# EAGLE board hd44780_backpack_16x1 (EAGLE 5.11)
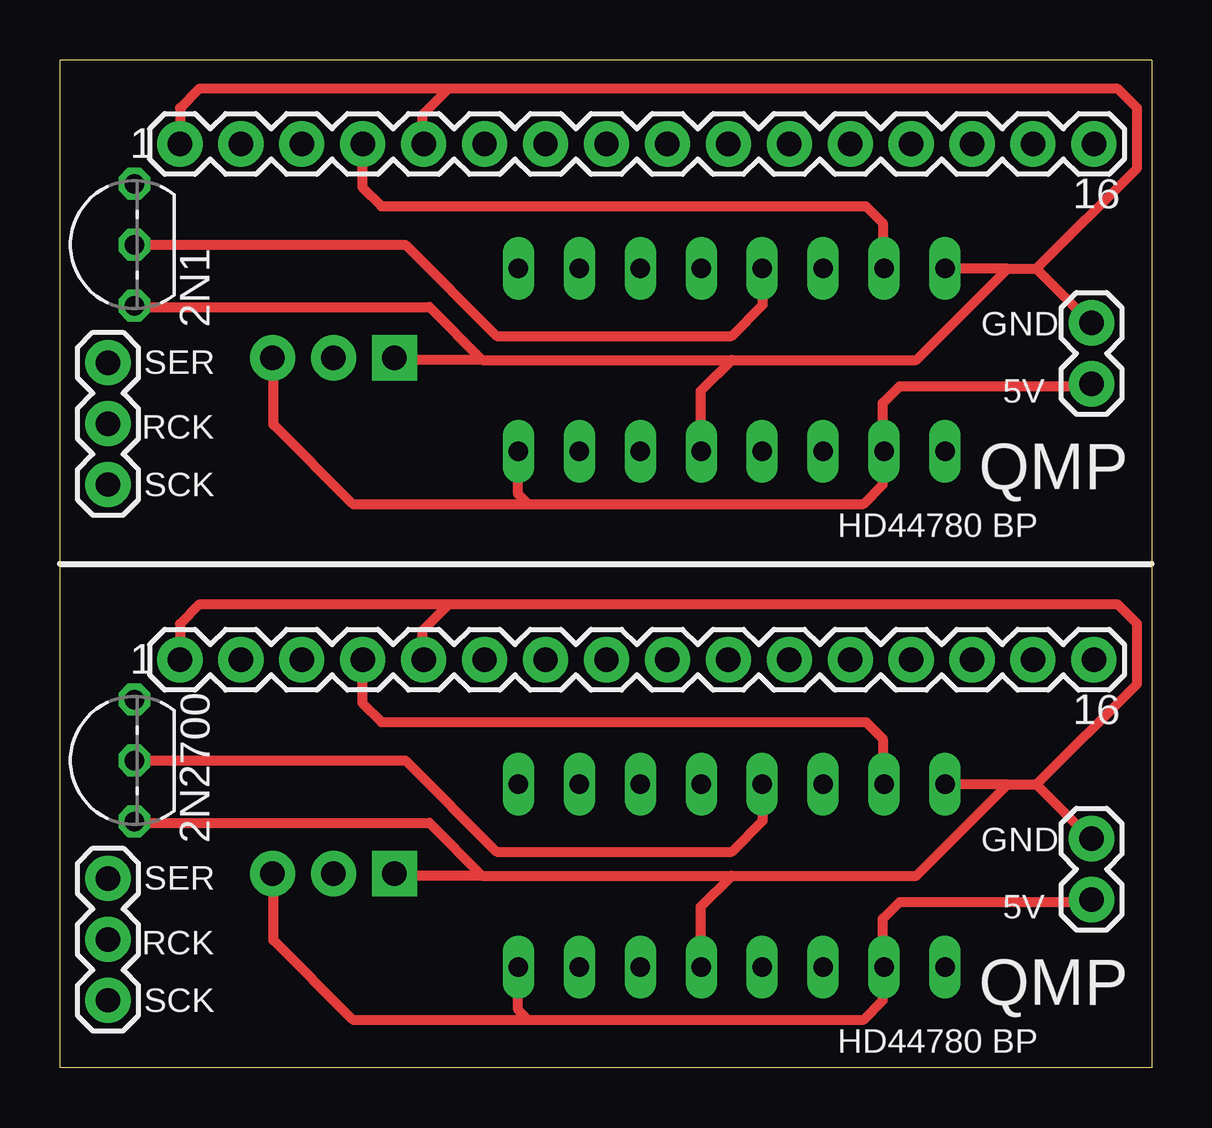
[diagram p0: board, top side]
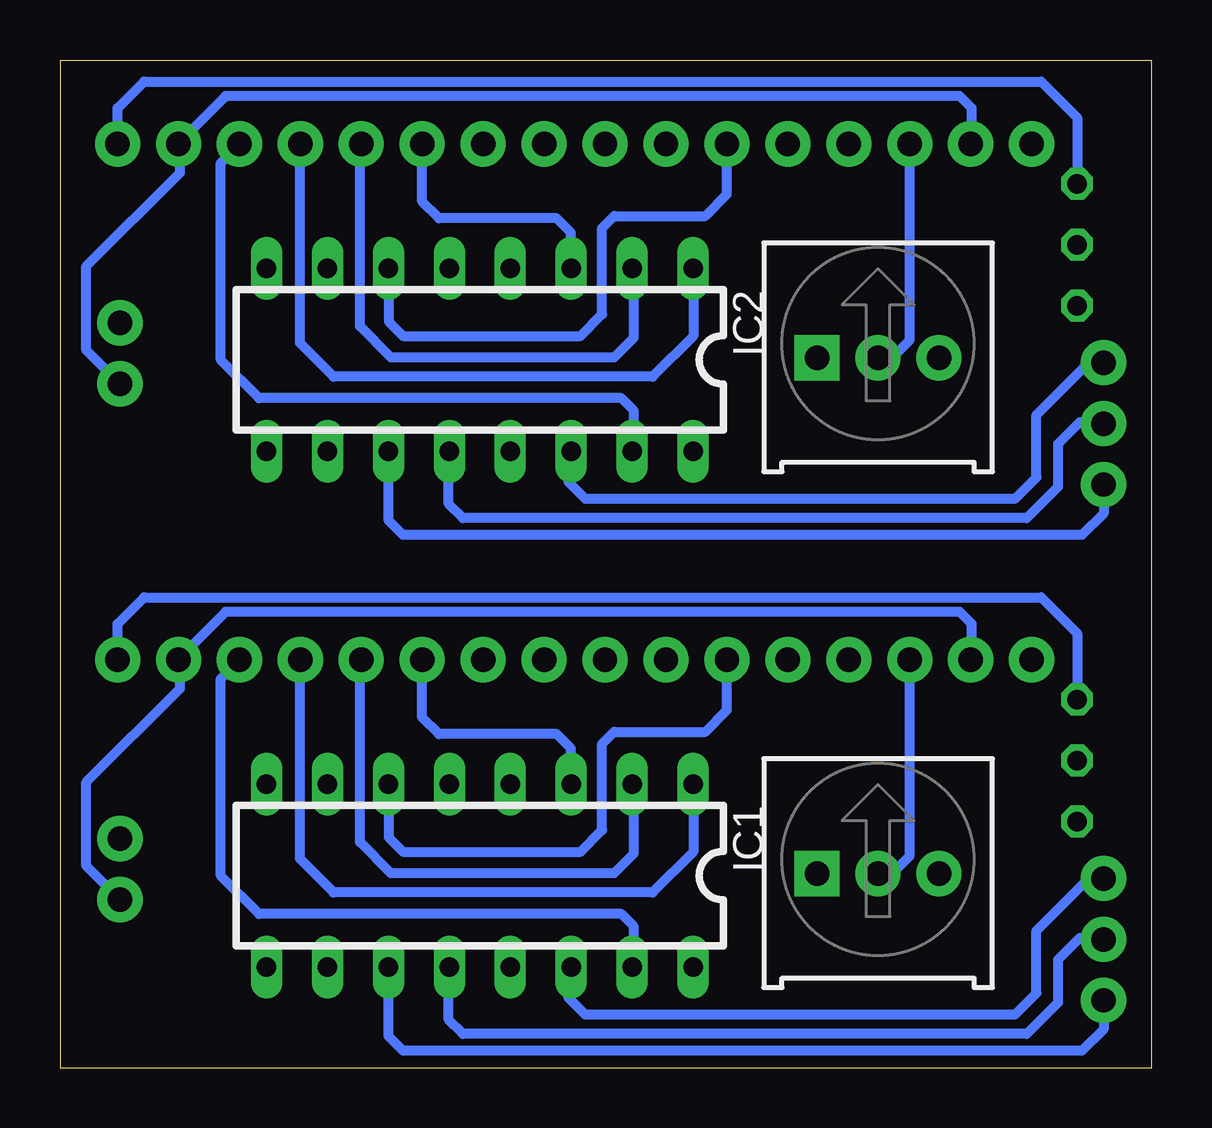
[diagram p1: board, bottom side, seen from below]

Size 45.5 x 42 mm. Coordinates in mm from the lower left corner, seen from the top.
Outline: 0,0 0,20.5 0,42 45.5,42 45.5,20.5 45.5,0 0,0
Copper layers (1*16): Top 0.035mm / dielectric 1.5mm / Bottom 0.035mm
Design rules "Fusion_eagle_rule_v1.1": minimum track width 6mil, minimum drill 12mil, track to track 6mil, track to pad 6mil, pad to pad 6mil, via to via 6mil, smd to smd 0mil, copper to edge 10mil, drill to drill 10mil, minimum pad ring 10mil, minimum via ring 6mil, stop-mask expansion 2mil, vias tented up to drill 100mil, thermal gap 10mil

## Footprints (pad centres in the part's own frame; a part is rotated, then mirrored left to right if it is on the bottom)
TO92- = drill 0.813 octagon: 1 -2.54,0; 2 0,0; 3 2.54,0
1X02 = drill 1.016 pad 1.88 round: 1 0,0; 2 2.54,0
3386U = drill 1.016 pad 1.88 square: 1 -2.54,-0.015 | drill 1.016 pad 1.88 round: 2 0,-0.015; 3 2.54,-0.015
1X16 = drill 1.016 pad 1.88 round: 1 0,0; 2 2.54,0; 3 5.08,0; 4 7.62,0; 5 10.16,0; 6 12.7,0; 7 15.24,0; 8 17.78,0; 9 20.32,0; 10 22.86,0; 11 25.4,0; 12 27.94,0; 13 30.48,0; 14 33.02,0; 15 35.56,0; 16 38.1,0
1X03 = drill 1.016 pad 1.88 round: 1 0,0; 2 2.54,0; 3 5.08,0
DIL16 = drill 0.813 long: 1 -8.89,-3.81; 2 -6.35,-3.81; 3 -3.81,-3.81; 4 -1.27,-3.81; 5 1.27,-3.81; 6 3.81,-3.81; 7 6.35,-3.81; 8 8.89,-3.81; 9 8.89,3.81; 10 6.35,3.81; 11 3.81,3.81; 12 1.27,3.81; 13 -1.27,3.81; 14 -3.81,3.81; 15 -6.35,3.81; 16 -8.89,3.81

## Placement (x,y rotation side)
2N1  [TO92-]  3.1,34.3 90 top
2N2700  [TO92-]  3.1,12.8 90 top
E$1  [1X02]  43,7 90 top
E$2  [3386U]  11.4,8.1 0 bottom
E$3  [1X16]  5,38.5 0 top
E$4  [1X16]  5,17 0 top
E$5  [1X03]  2,2.8 90 top
E$6  [1X02]  43,28.5 90 top
E$7  [1X03]  2,24.3 90 top
E$8  [3386U]  11.4,29.6 0 bottom
IC1  [DIL16]  28,8 180 bottom
IC2  [DIL16]  28,29.5 180 bottom

## Library data of the parts
2N1 2N2700 = maxim
E$1-E$8 IC1 IC2 = SparkFun

## Nets
S$1: 2N2700.2
S$3: E$4.1
S$4: E$1.1
S$5: E$5.1
S$10: E$4.11
S$11: E$4.6
S$16: E$4.16
S$18: E$6.1
S$23: E$3.11
S$24: E$3.6
S$25: E$7.1
S$30: 2N1.2
S$31: E$3.1
S$32: E$3.16

## Tracks (layer width: path | path; a pad name or v marks a point on that pad's centre or on a via)
S$1
  Top 0.406: 2N2700.2 14.4,12.8 18.2,9 28,9 29.3,10.3 29.3,11.8
S$2
  Bottom 0.406: 19.1,11.8 19.1,9 20.8,7.3 34.1,7.3 35.5,8.7 35.5,17
S$3
  Top 0.406: E$4.1 5,18.5 5.8,19.3 16.2,19.3 | 15.1,16.9 15.1,18.2 16.2,19.3 | 40.7,11.8 43,9.5 | 40.7,11.8 40.8,11.8 | 39.5,11.8 36.9,11.8 | 39.5,11.8 40.7,11.8 | 39.5,11.8 35.7,8 28,8 | 26.7,4.2 26.7,6.7 28,8 | 17.6,8 28,8 | 17.6,8 14,8 | 17.6,8 15.4,10.2 3.2,10.2 | 16.2,19.3 44.1,19.3 44.9,18.5 44.9,16 40.7,11.8
S$4
  Top 0.406: 34.3,4.2 34.3,6.2 35,6.9 42.9,6.9 E$1.1
  Bottom 0.406: 40.5,17 40.5,15.8 44.4,11.9 44.4,8.4 E$1.1
S$5
  Bottom 0.406: E$5.1 2,1.6 2.9,0.7 31.2,0.7 31.8,1.3 31.8,4.2
S$6
  Top 0.406: 12.6,17 12.6,15.2 13.4,14.4 33.6,14.4 34.3,13.7 34.3,11.8
S$7
  Bottom 0.406: 7.5,17 7.5,18.5 8,19 38.6,19 40.6,17
S$8
  Bottom 0.406: 21.6,4.2 21.6,5.9 22.1,6.4 37.2,6.4 38.8,8 38.8,16.2 38,17
S$9
  Bottom 0.406: 21.6,11.8 21.6,8.9 22.4,8.1 31.7,8.1 33,9.4 33,17
S$10
  Bottom 0.406: 24.2,11.8 24.2,13.3 24.8,13.9 29.7,13.9 30.4,14.6 E$4.11
S$11
  Bottom 0.406: 31.8,11.8 31.8,9.6 31.2,9 23.8,9 22.9,9.9 22.9,13.5 22.4,14 18.6,14 17.7,14.9 E$4.6
S$12
  Top 0.406: 34.3,4.1 34.3,2.8 33.5,2 19.5,2 | 19.1,4.2 19.1,2.4 19.5,2 | 8.9,8.1 8.9,5.3 12.2,2 19.5,2
S$13
  Bottom 0.406: 29.3,4.2 29.3,2 28.7,1.4 5.2,1.4 3.9,2.7 3.9,4.5 3,5.4 2,5.4
S$14
  Bottom 0.406: 24.2,4.2 24.3,4.1 24.3,2.9 23.6,2.2 5.7,2.2 4.8,3.1 4.8,5.7 2.6,7.9 2,7.9
S$15
  Bottom 0.406: 10.1,17 10.1,8.8 10.8,8.1 11.4,8.1
S$16
  Bottom 0.406: E$4.16 43.1,18.5 42,19.6 4.6,19.6 3.1,18.1 3.1,15.3
S$17
  Bottom 0.406: 7.5,38.5 7.5,40 8,40.5 38.6,40.5 40.6,38.5
S$18
  Top 0.406: 34.3,25.7 34.3,27.7 35,28.4 42.9,28.4 E$6.1
  Bottom 0.406: 40.5,38.5 40.5,37.3 44.4,33.4 44.4,29.9 E$6.1
S$19
  Top 0.406: 12.6,38.5 12.6,36.7 13.4,35.9 33.6,35.9 34.3,35.2 34.3,33.3
S$20
  Bottom 0.406: 21.6,25.7 21.6,27.4 22.1,27.9 37.2,27.9 38.8,29.5 38.8,37.7 38,38.5
S$21
  Bottom 0.406: 19.1,33.3 19.1,30.5 20.8,28.8 34.1,28.8 35.5,30.2 35.5,38.5
S$22
  Bottom 0.406: 21.6,33.3 21.6,30.4 22.4,29.6 31.7,29.6 33,30.9 33,38.5
S$23
  Bottom 0.406: 24.2,33.3 24.2,34.8 24.8,35.4 29.7,35.4 30.4,36.1 E$3.11
S$24
  Bottom 0.406: 31.8,33.3 31.8,31.1 31.2,30.5 23.8,30.5 22.9,31.4 22.9,35 22.4,35.5 18.6,35.5 17.7,36.4 E$3.6
S$25
  Bottom 0.406: E$7.1 2,23.1 2.9,22.2 31.2,22.2 31.8,22.8 31.8,25.7
S$26
  Bottom 0.406: 24.2,25.7 24.3,25.6 24.3,24.4 23.6,23.7 5.7,23.7 4.8,24.6 4.8,27.2 2.6,29.4 2,29.4
S$27
  Bottom 0.406: 10.1,38.5 10.1,30.3 10.8,29.6 11.4,29.6
S$28
  Top 0.406: 34.3,25.6 34.3,24.3 33.5,23.5 19.5,23.5 | 19.1,25.7 19.1,23.9 19.5,23.5 | 8.9,29.6 8.9,26.8 12.2,23.5 19.5,23.5
S$29
  Bottom 0.406: 29.3,25.7 29.3,23.5 28.7,22.9 5.2,22.9 3.9,24.2 3.9,26 3,26.9 2,26.9
S$30
  Top 0.406: 2N1.2 14.4,34.3 18.2,30.5 28,30.5 29.3,31.8 29.3,33.3
S$31
  Top 0.406: E$3.1 5,40 5.8,40.8 16.2,40.8 | 15.1,38.4 15.1,39.7 16.2,40.8 | 40.7,33.3 43,31 | 40.7,33.3 40.8,33.3 | 39.5,33.3 36.9,33.3 | 39.5,33.3 40.7,33.3 | 39.5,33.3 35.7,29.5 28,29.5 | 26.7,25.7 26.7,28.2 28,29.5 | 17.6,29.5 28,29.5 | 17.6,29.5 14,29.5 | 17.6,29.5 15.4,31.7 3.2,31.7 | 16.2,40.8 44.1,40.8 44.9,40 44.9,37.5 40.7,33.3
S$32
  Bottom 0.406: E$3.16 43.1,40 42,41.1 4.6,41.1 3.1,39.6 3.1,36.8

## Text on the board
tPlace: 1 | 16 | GND | SER | 5V | RCK | SCK | QMP | HD44780 BP | 1 | 16 | GND | SER | 5V | RCK | QMP | SCK | HD44780 BP